# EAGLE board atmelModule (EAGLE 6.4)
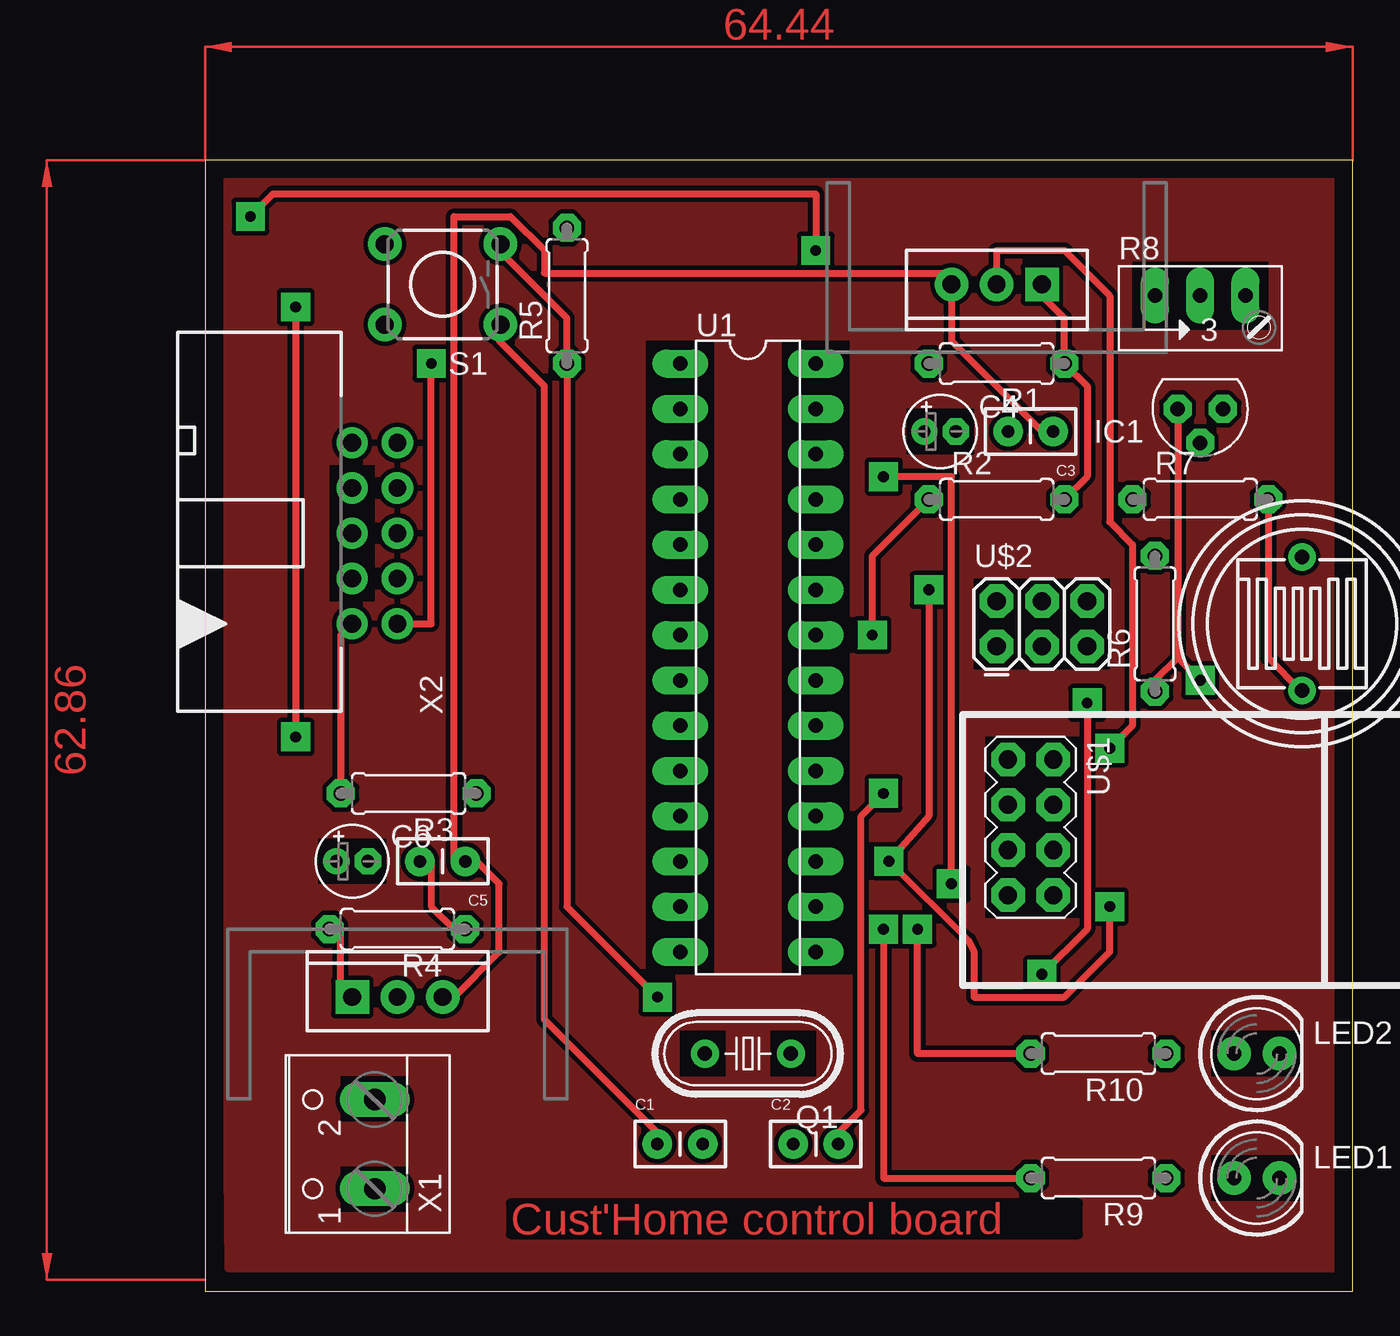
[diagram p0: board, top side]
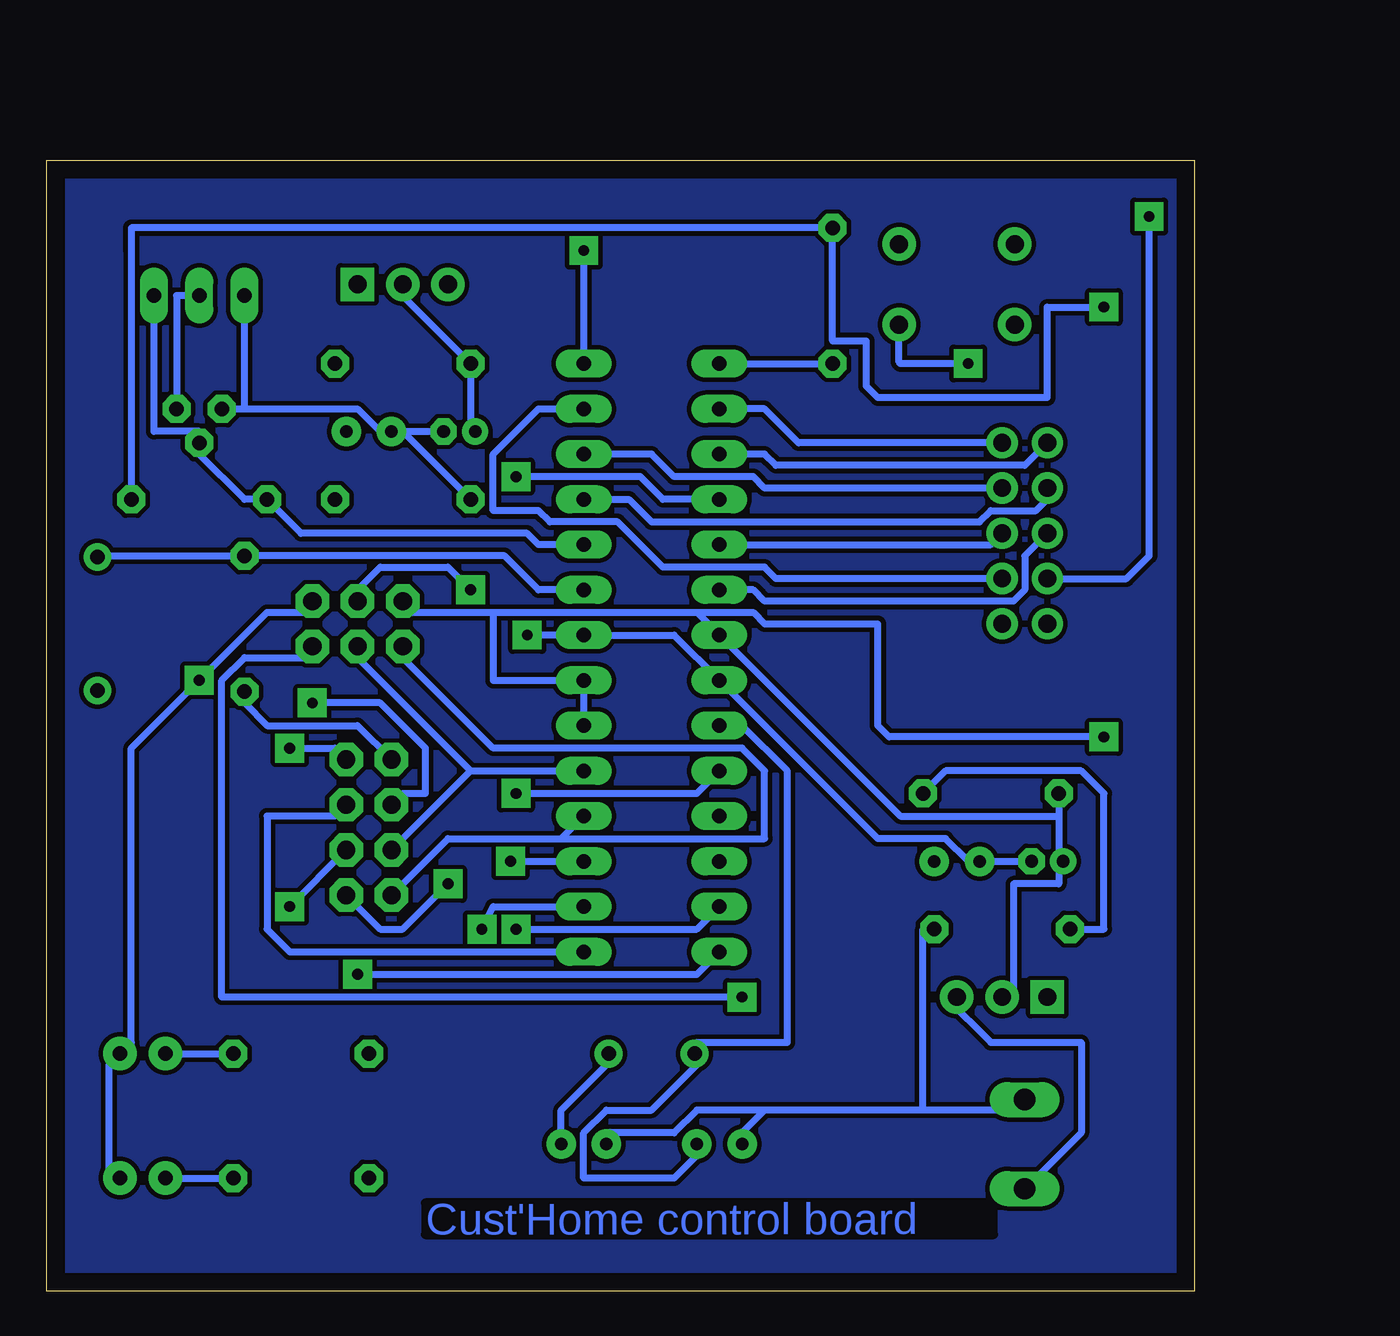
[diagram p1: board, bottom side, seen from below]

Size 64.44 x 63.49 mm. Coordinates in mm from the lower left corner, seen from the top.
Outline: 0,0 64.44,0 64.44,63.49 0,63.49 0,0
Copper layers (1*16): Top 0.035mm / dielectric 1.5mm / Bottom 0.035mm
Design rules "rulesDesign *": minimum track width 15mil, minimum drill 24mil, track to track 10mil, track to pad 10mil, pad to pad 10mil, via to via 10mil, smd to smd 8mil, copper to edge 40mil, drill to drill 8mil, minimum pad ring 15mil, minimum via ring 20mil, stop-mask expansion 4mil, vias tented up to drill 0mil, thermal gap 10mil
tRestrict: area 24.8,17.8 to 28.6,53.3; area 32.4,17.8 to 36.2,53.3; area 59.1,12.1 to 61.6,14.6; area 56.5,12.1 to 59.1,14.6; area 56.5,5.1 to 61.6,7.6; area 52.1,54 to 59.7,57.8; area 43.2,34.9 to 50.8,40; area 43.8,21 to 48.9,31.1; area 31.7,12.1 to 34.3,14.6; area 26.7,12.1 to 29.2,14.6; area 6.4,22.9 to 10.2,25.4; area 7.6,9.5 to 11.4,12.1; 3 more areas
vRestrict: area 24.8,17.8 to 36.2,53.3; area 5.1,3.2 to 14.6,13.3; area 8.9,53.3 to 17.8,59.7; area 45.1,10.2 to 62.2,16.5; area 45.1,3.2 to 62.2,9.5; area 39.4,54 to 49.5,58.4; area 50.8,43.2 to 61,45.7; area 52.7,46.4 to 59.1,51.4; area 50.8,52.7 to 61,57.8; area 42.5,34.3 to 51.4,40.6; area 43.2,20.3 to 49.5,31.8; area 24.1,7 to 29.2,9.5; 9 more areas

## Footprints (pad centres in the part's own frame; a part is rotated, then mirrored left to right if it is on the bottom)
CAP-PTH-SMALL2 = drill 0.7 pad 1.651: 1 0,0; 2 2.54,0
E1,8-4 = drill 0.711 pad 1.168: + -0.889,0 | drill 0.711 pad 1.168 octagon: - 0.889,0
TO92 = drill 0.813 octagon: 1 1.27,0; 2 0,1.905; 3 -1.27,0
LED5MM = drill 0.813 pad 1.88: A -1.27,0; K 1.27,0
TO-8_B10 = drill 0.8 pad 1.4: 1 -3.75,0; 2 3.75,0
HC49U-V = drill 0.813: 1 -2.413,0; 2 2.413,0
0207/7 = drill 0.813 octagon: 1 -3.81,0; 2 3.81,0
RJ9W = drill 0.813 long: A 2.54,0.635; E -2.54,0.635; S 0,0.635
TACTILE-PTH = drill 1.016 pad 1.88: 1 -3.251,2.261; 2 3.251,2.261; 3 -3.251,-2.261; 4 3.251,-2.261
DIL-28-3 = drill 0.813 pad 1.321 long: 1 -16.51,-3.81; 2 -13.97,-3.81; 3 -11.43,-3.81; 4 -8.89,-3.81; 5 -6.35,-3.81; 6 -3.81,-3.81; 7 -1.27,-3.81; 8 1.27,-3.81; 9 3.81,-3.81; 10 6.35,-3.81; 11 8.89,-3.81; 12 11.43,-3.81; 13 13.97,-3.81; 14 16.51,-3.81; 15 16.51,3.81; 16 13.97,3.81; 17 11.43,3.81; 18 8.89,3.81; 19 6.35,3.81; 20 3.81,3.81; 21 1.27,3.81; 22 -1.27,3.81; 23 -3.81,3.81; 24 -6.35,3.81; 25 -8.89,3.81; 26 -11.43,3.81; 27 -13.97,3.81; 28 -16.51,3.81
TO220-ADJ = drill 1 pad 1.88 square: ADJ -2.54,0 | drill 1 pad 1.88: IN 2.54,0; OUT 0,0
2X4 = drill 1.016 pad 1.88 octagon: 1 -3.81,-1.27; 2 -3.81,1.27; 3 -1.27,-1.27; 4 -1.27,1.27; 5 1.27,-1.27; 6 1.27,1.27; 7 3.81,-1.27; 8 3.81,1.27
2X3 = drill 1.016 pad 1.88 octagon: 1 0,0; 2 0,2.54; 3 2.54,0; 4 2.54,2.54; 5 5.08,0; 6 5.08,2.54
W237-102 = drill 1.194 long: 1 -2.5,-1.27; 2 2.5,-1.27
PAK100/2500-5-10 = drill 1 pad 1.422: 1 -5.08,-1.27; 2 -5.08,1.27; 3 -2.54,-1.27; 4 -2.54,1.27; 5 0,-1.27; 6 0,1.27; 7 2.54,-1.27; 8 2.54,1.27; 9 5.08,-1.27; 10 5.08,1.27

## Placement (x,y rotation side)
C1  22pF  [CAP-PTH-SMALL2]  25.4,8.26 0 top
C2  22pF  [CAP-PTH-SMALL2]  33.02,8.26 0 top
C3  0.1uF  [CAP-PTH-SMALL2]  47.62,48.26 180 top
C4  1uF  [E1,8-4]  41.27,48.26 0 top
C5  0.1uF  [CAP-PTH-SMALL2]  14.61,24.13 180 top
C6  1uF  [E1,8-4]  8.26,24.13 0 top
IC1  LT1009CZ  [TO92]  55.88,49.53 180 top
LED1  [LED5MM]  59.05,6.35 0 top
LED2  [LED5MM]  59.05,13.34 0 top
PH1  B1060_23  [TO-8_B10]  61.59,37.47 90 top
Q1  16MHz  [HC49U-V]  30.48,13.34 180 top
R1  220  [0207/7]  44.45,52.07 180 top
R2  360  [0207/7]  44.45,44.45 0 top
R3  180  [0207/7]  11.43,27.94 180 top
R4  550  [0207/7]  10.79,20.32 180 top
R5  550  [0207/7]  20.32,55.88 90 top
R6  10K  [0207/7]  53.34,37.47 90 top
R7  1K  [0207/7]  55.88,44.45 0 top
R8  10K  [RJ9W]  55.88,55.24 0 top
R9  1K  [0207/7]  50.16,6.35 180 top
R10  1K  [0207/7]  50.16,13.34 180 top
S1  SWITCH-MOMENTARY-2PTH  [TACTILE-PTH]  13.34,56.52 180 top
U1  [DIL-28-3]  30.48,35.56 270 top
U2  V_REG_317SINK  [TO220-ADJ]  44.45,56.52 180 top
U3  V_REG_317SINK  [TO220-ADJ]  10.79,16.51 0 top
U$1  M04X2  [2X4]  46.35,26.04 270 top
U$2  AVR_SPI_PRG_6PTH  [2X3]  44.45,36.2 0 top
X1  [W237-102]  8.26,8.26 90 top
X2  2510-5  [PAK100/2500-5-10]  9.53,42.55 90 top

## Library data of the parts
C1-C3 C5 = SparkFun-Capacitors
C4 C6 = qfm-trx1-24g
IC1 = linear-technology-2
LED1 LED2 U$2 = SparkFun
PH1 = photo-elements
Q1 = crystal
R1-R7 R9 R10 = rcl
R8 = pot
S1 = SparkFun-Electromechanical
U1 = atmel_prototype_header
U2 U3 = SparkFun-PowerIC
U$1 = SparkFun-Connectors
X1 = con-wago-500; MPN: 237-102; OC_FARNELL: unknown; OC_NEWARK: 70K9898
X2 = con-3m; OC_FARNELL: 1788669; OC_NEWARK: unknown

## Nets
3.3V: C4.+ R1.2 U2.OUT U$1.2
5V: C6.+ PH1.1 R3.2 R5.2 R7.2 U1.7 U1.20 U1.21 U3.OUT U$2.2 X2.2
+12V: C3.1 C5.1 U2.IN U3.IN X1.1
AD0: PH1.2 R6.2 U1.23
AD1: IC1.2 R7.1 R8.A U1.24
GND: C1.1 C2.1 C3.2 C4.- C5.2 C6.- IC1.1 LED1.K LED2.K R2.1 R4.1 R6.1 R8.E S1.1 U1.8 U1.22 U$1.1 U$2.6 X1.2 X2.1
INT0: U1.4 U$1.8
LED1: R9.2 U1.13
LED2: R10.2 U1.16
N$1: C1.2 Q1.2 U1.9
N$2: C2.2 Q1.1 U1.10
N$3: R3.1 R4.2 U3.ADJ
N$4: U1.14 U$1.3
N$5: U1.15 U$1.4
N$6: U1.19 U$1.5 U$2.3
N$7: R1.1 R2.2 U2.ADJ
N$8: U1.17 U$1.6 U$2.4
N$9: U1.18 U$1.7 U$2.1
N$10: LED1.A R9.1
N$11: LED2.A R10.1
N$12: U1.3 X2.10
N$13: U1.5 X2.5
N$14: IC1.3 R8.S
N$15: U1.6 X2.6
N$16: U1.26 X2.7
N$17: U1.25 X2.8
N$18: U1.2 X2.9
N$21: U1.27 X2.3
N$22: U1.28 X2.4
RESET: R5.1 S1.3 U1.1 U$2.5

## Tracks (layer width: path | path; a pad name or v marks a point on that pad's centre or on a via)
3.3V  (via drill 0.61)
  Top 0.381: v50.8,30.48 52.07,31.75 52.07,41.91 50.8,43.18 50.8,55.88 48.26,58.42 44.45,58.42 U2.OUT
  Bottom 0.381: C4.+ 40.64,48.26 R1.2 44.45,55.88 U2.OUT | v50.8,30.48 48.26,30.48 U$1.2
5V  (via drill 0.6)
  Top 0.406: R7.2 59.69,35.56 61.53,33.72 PH1.1 | X2.2 7.62,36.83 R3.2 | v5.08,55.24 v5.08,31.11
  Bottom 0.381: R3.2 7.62,26.67 | 7.62,26.67 7.62,24.13 | 7.62,24.13 7.62,22.86 10.16,22.86 10.16,16.51 U3.OUT | 7.62,24.13 C6.+ | U1.20 U1.21 39.37,34.29 39.37,38.1 | 39.37,38.1 44.45,38.1 U$2.2 | 39.37,38.1 27.94,38.1 U1.7 16.51,26.67 7.62,26.67 | 20.32,53.34 R5.2 | 59.69,58.42 R7.2
  Bottom 0.406: R5.2 59.69,59.69 59.69,58.42 | 20.32,53.34 18.41,53.34 18.41,50.8 17.78,50.16 8.26,50.16 8.26,55.24 v5.08,55.24 | v5.08,31.11 17.14,31.11 17.78,31.75 17.78,37.47 24.13,37.47 24.77,38.1 27.94,38.1
+12V
  Top 0.381: C3.1 46.99,48.26 41.91,53.34 U2.IN 41.91,57.15 19.05,57.15 19.05,58.42 | U3.IN 13.97,16.51 16.51,19.05 16.51,22.86 15.24,24.13 C5.1 13.97,24.13
  Top 0.406: 13.97,24.13 13.97,60.33 17.14,60.33 19.05,58.42
  Bottom 0.381: X1.1 8.89,6.35 6.35,8.89 6.35,13.97 11.43,13.97 13.97,16.51 U3.IN
AD0
  Bottom 0.406: PH1.2 61.53,41.27 R6.2 38.73,41.27 36.83,39.37 U1.23
AD1
  Bottom 0.381: 50.8,43.18 R7.1 53.34,44.45 55.88,46.99 IC1.2 55.88,48.26 58.42,48.26 R8.A
  Bottom 0.406: 50.8,43.18 50.16,42.55 37.47,42.55 36.83,41.91 U1.24
GND  (via drill 0.6, 0.61)
  Top 0.381: 54.61,35.56 53.34,34.29 R6.1 | IC1.1 54.61,35.56 | v55.88,34.29 54.61,35.56 | R4.1 13.97,20.32 12.7,21.59 12.7,24.13 C5.2 | S1.1 16.51,53.34 19.05,50.8 19.05,15.24 25.4,8.89 C1.1
  Top 0.406: X2.1 12.7,37.47 v12.7,52.07 | v37.47,36.83 37.47,41.27 R2.1
  Bottom 0.381: 44.45,48.26 C4.- 41.91,48.26 | 44.45,48.26 R2.1 | 44.45,48.26 C3.2 45.72,48.26 46.99,49.53 53.34,49.53 | 53.34,49.53 R8.E | IC1.1 53.34,49.53 | U$1.1 46.99,31.75 52.07,31.75 53.34,33.02 R6.1 | LED1.K 60.96,6.35 60.96,12.7 LED2.K 59.69,13.97 59.69,30.48 v55.88,34.29 52.07,38.1 49.53,38.1 U$2.6 | U1.22 29.21,36.83 U1.8 17.78,25.4 13.97,25.4 12.7,24.13 C5.2 C6.- 8.89,24.13 | 24.13,10.16 25.4,8.89 C1.1 | 15.24,10.16 10.16,10.16 X1.2 | 15.24,10.16 24.13,10.16 | 24.13,10.16 27.94,10.16 29.21,8.89 33.02,8.89 C2.1 | 15.24,10.16 15.24,20.32 R4.1
  Bottom 0.406: v12.7,52.07 16.51,52.07 16.59,52.15 S1.1 | U1.22 v37.47,36.83
INT0  (via drill 0.61)
  Top 0.381: v38.1,45.72 41.91,45.72 v41.91,22.86
  Bottom 0.381: v41.91,22.86 44.45,20.32 45.72,20.32 U$1.8
  Bottom 0.406: U1.4 29.84,44.45 31.11,45.72 v38.1,45.72
LED1  (via drill 0.61)
  Top 0.381: 45.72,6.35 R9.2
  Top 0.406: v38.1,20.32 38.1,6.35 R9.2
  Bottom 0.381: U1.13 27.94,20.32 v38.1,20.32
LED2  (via drill 0.6)
  Top 0.406: R10.2 40.01,13.34 v40.01,20.32
  Bottom 0.406: v40.01,20.32 39.37,21.59 U1.16
N$1
  Bottom 0.381: C1.2 27.94,7.62 29.21,6.35 34.29,6.35 34.29,8.89 33.02,10.16 30.48,10.16 27.94,12.7 Q1.2 27.94,13.97 22.86,13.97 22.86,29.21 25.4,31.75 U1.9
N$2  (via drill 0.61)
  Top 0.381: v38.1,27.94 36.83,26.67 36.83,10.16 35.56,8.89 C2.2
  Bottom 0.381: C2.2 35.56,10.16 33.02,12.7 Q1.1 | U1.10 27.94,27.94 v38.1,27.94
N$3
  Top 0.381: R4.2 7.62,20.32 7.62,16.51 U3.ADJ
  Bottom 0.381: R3.1 13.97,29.21 6.35,29.21 5.08,27.94 5.08,20.32 R4.2
N$4  (via drill 0.61)
  Top 0.381: v46.99,17.78 49.53,20.32 v49.53,33.02
  Bottom 0.381: U1.14 27.94,17.78 v46.99,17.78 | v49.53,33.02 45.72,33.02 43.18,30.48 43.18,27.94 44.45,27.94 U$1.3
N$5
  Bottom 0.381: U1.15 50.8,19.05 52.07,20.32 52.07,26.67 48.26,26.67 U$1.4
N$6
  Bottom 0.381: 40.64,29.21 U1.19 | U$1.5 40.64,29.21 | 40.64,29.21 46.99,35.56 U$2.3
N$7
  Top 0.381: R2.2 49.53,45.72 49.53,50.8 R1.1 48.26,54.61 46.99,55.88 U2.ADJ
N$8  (via drill 0.61)
  Top 0.3: v38.41,24.14 42.85,19.7
  Top 0.381: v38.41,24.14 40.64,26.67 v40.64,39.37 | v50.8,21.59 50.8,19.05 48.26,16.51 43.18,16.51 43.18,19.05
  Top 0.406: 42.85,19.7 43.18,19.05
  Bottom 0.381: v38.41,24.14 U1.17 | v40.64,39.37 41.91,40.64 45.72,40.64 46.99,39.37 U$2.4 | v50.8,21.59 U$1.6
N$9
  Bottom 0.381: 35.56,25.4 U1.18 | 35.56,25.4 41.91,25.4 U$1.7 | 35.56,25.4 24.13,25.4 24.13,29.21 25.4,30.48 39.37,30.48 44.45,35.56 U$2.1
N$10
  Bottom 0.381: LED1.A R9.1
N$11
  Bottom 0.406: LED2.A R10.1
N$12
  Bottom 0.406: X2.10 9.53,46.35 23.5,46.35 24.13,46.99 U1.3
N$13
  Bottom 0.406: X2.5 11.43,41.91 U1.5
N$14
  Bottom 0.381: IC1.3 57.15,55.88 R8.S
N$15
  Bottom 0.406: X2.6 9.53,41.27 9.53,39.37 10.16,38.73 24.13,38.73 24.77,39.37 U1.6
N$16
  Bottom 0.406: X2.7 24.13,45.09 24.77,45.72 29.21,45.72 30.48,46.99 U1.26
N$17
  Bottom 0.406: X2.8 8.26,44.45 8.89,43.81 11.43,43.81 12.06,43.18 30.48,43.18 31.75,44.45 U1.25
N$18
  Bottom 0.406: X2.9 22.23,47.62 24.13,49.53 U1.2
N$19
  pour Top: 0.64,62.87 1.27,1.27 63.5,1.27 63.5,62.87 1.27,62.87
N$20
  pour Bottom: 0.64,62.87 63.5,62.87 63.5,0.64 0.64,0.64
N$21
  Bottom 0.406: X2.3 23.5,40.01 24.13,40.64 29.84,40.64 32.38,43.18 36.2,43.18 36.83,43.81 39.37,43.81 39.37,46.99 36.83,49.53 U1.27
N$22  (via drill 0.6)
  Top 0.406: v2.54,60.33 3.81,61.59 34.29,61.59 v34.29,58.42
  Bottom 0.406: X2.4 3.81,40.01 2.54,41.27 v2.54,60.33 | v34.29,58.42 U1.28
RESET  (via drill 0.61)
  Top 0.381: S1.3 16.51,58.42 20.32,54.61 R5.1 20.32,21.59 v25.4,16.51
  Bottom 0.381: U1.1 R5.1 | v25.4,16.51 54.61,16.51 54.61,34.29 53.34,35.56 49.53,35.56 U$2.5
(copper drawn outside any net)
  shapes: Top area x2

## Text on the board
Top: Cust'Home control board
Bottom: Cust'Home control board
tValues: GND | 5v | 3.3v | GND